# EAGLE board UDOOCONNECTIVITYSHIELD (EAGLE 7.1.0)
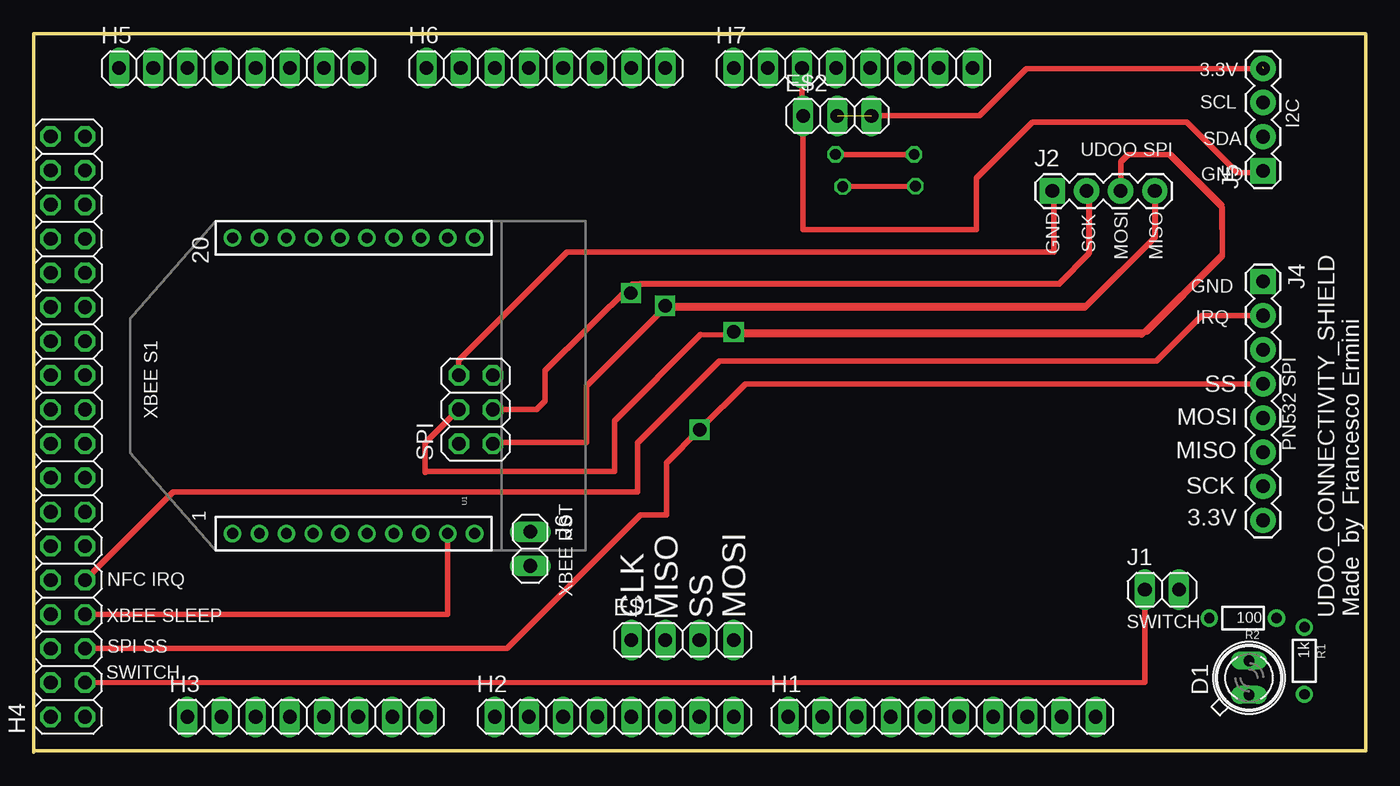
[diagram p0: board, top side]
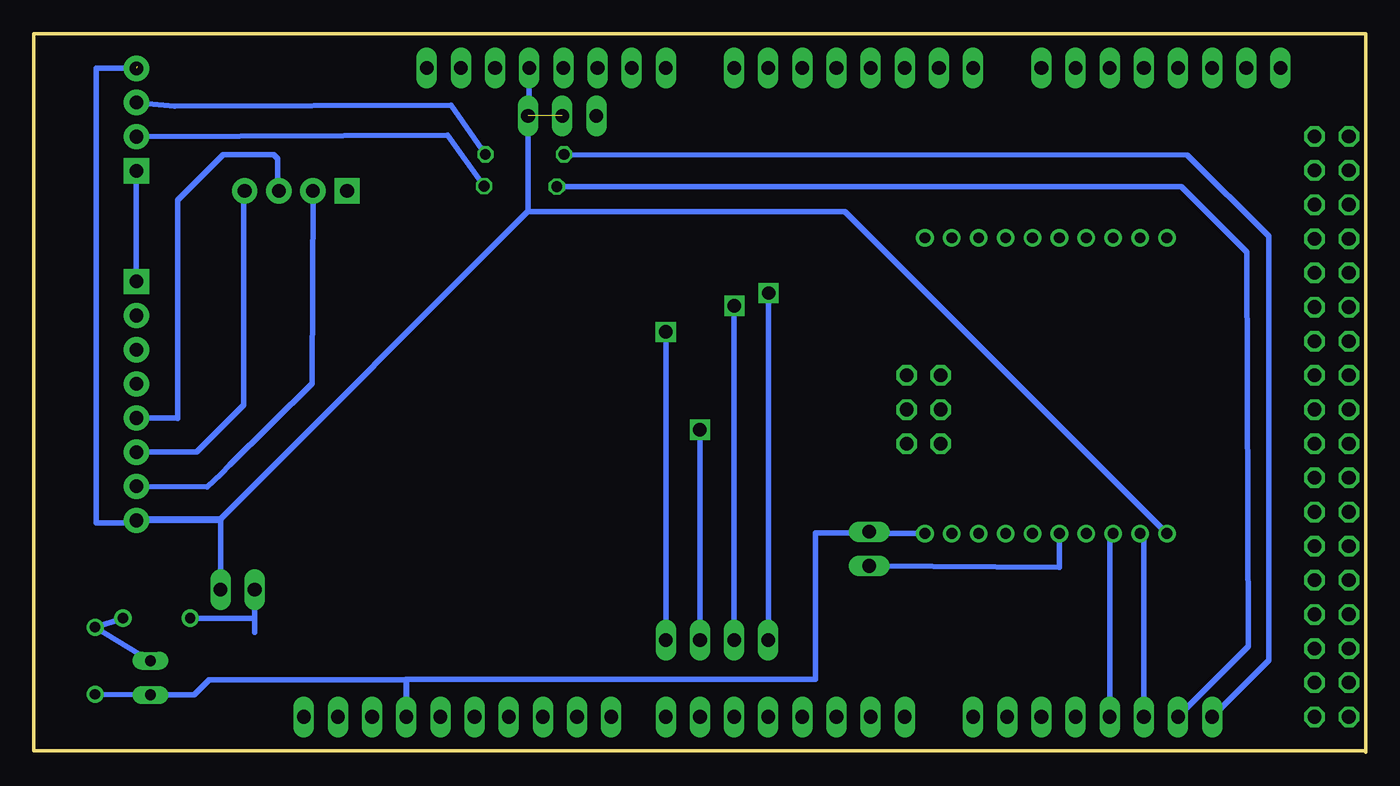
[diagram p1: board, bottom side, seen from below]

Size 99.09 x 53.47 mm. Coordinates in mm from the lower left corner, seen from the top.
Outline: 0,0.1 99.09,0.1 99.09,53.47 0,53.47 0,0.1
Outline: 0,0.1 0,0
Copper layers (1*16): Top 0.035mm / dielectric 1.5mm / Bottom 0.035mm
Design rules "default": minimum track width 10mil, minimum drill 24mil, track to track 8mil, track to pad 8mil, pad to pad 8mil, via to via 8mil, smd to smd 8mil, copper to edge 40mil, drill to drill 8mil, minimum pad ring 10mil, minimum via ring 8mil, stop-mask expansion 4mil, vias tented up to drill 0mil, thermal gap 10mil
Net classes: 0 default: width 0.254 mm

## Footprints (pad centres in the part's own frame; a part is rotated, then mirrored left to right if it is on the bottom)
SFH480 = drill 0.813 long: A 1.27,0; K -1.27,0
1X04 = drill 1.016 long: 1 -3.81,0; 2 -1.27,0; 3 1.27,0; 4 3.81,0
1X03 = drill 1.016 long: 1 -2.54,0; 2 0,0; 3 2.54,0
1X10 = drill 1.016 long: 1 -11.43,0; 2 -8.89,0; 3 -6.35,0; 4 -3.81,0; 5 -1.27,0; 6 1.27,0; 7 3.81,0; 8 6.35,0; 9 8.89,0; 10 11.43,0
1X08 = drill 1.016 long: 1 -8.89,0; 2 -6.35,0; 3 -3.81,0; 4 -1.27,0; 5 1.27,0; 6 3.81,0; 7 6.35,0; 8 8.89,0
2X18 = drill 1.016 octagon: 1 -21.59,-1.27; 2 -21.59,1.27; 3 -19.05,-1.27; 4 -19.05,1.27; 5 -16.51,-1.27; 6 -16.51,1.27; 7 -13.97,-1.27; 8 -13.97,1.27; 9 -11.43,-1.27; 10 -11.43,1.27; 11 -8.89,-1.27; 12 -8.89,1.27; 13 -6.35,-1.27; 14 -6.35,1.27; 15 -3.81,-1.27; 16 -3.81,1.27; 17 -1.27,-1.27; 18 -1.27,1.27; 19 1.27,-1.27; 20 1.27,1.27; 21 3.81,-1.27; 22 3.81,1.27; 23 6.35,-1.27; 24 6.35,1.27; 25 8.89,-1.27; 26 8.89,1.27; 27 11.43,-1.27; 28 11.43,1.27; 29 13.97,-1.27; 30 13.97,1.27; 31 16.51,-1.27; 32 16.51,1.27; 33 19.05,-1.27; 34 19.05,1.27; 35 21.59,-1.27; 36 21.59,1.27
1X02 = drill 1.016 long: 1 -1.27,0; 2 1.27,0
1X04' = drill 1.016 pad 1.88 square: 1 0,0 | drill 1.016 pad 1.88: 2 2.54,0; 3 5.08,0; 4 7.62,0
1X08' = drill 1.016 pad 1.88 square: 1 0,0 | drill 1.016 pad 1.88: 2 2.54,0; 3 5.08,0; 4 7.62,0; 5 10.16,0; 6 12.7,0; 7 15.24,0; 8 17.78,0
1/6W-RES = drill 0.762: 1 -2.5,0; 2 2.5,0
2X03 = drill 1.016 octagon: 1 -2.54,-1.27; 2 -2.54,1.27; 3 0,-1.27; 4 0,1.27; 5 2.54,-1.27; 6 2.54,1.27
XBEE-1 = drill 0.8: 1 -11,20; 2 -11,18; 3 -11,16; 4 -11,14; 5 -11,12; 6 -11,10; 7 -11,8; 8 -11,6; 9 -11,4; 10 -11,2; 11 11,2; 12 11,4; 13 11,6; 14 11,8; 15 11,10; 16 11,12; 17 11,14; 18 11,16; 19 11,18; 20 11,20

## Placement (x,y rotation side)
D1  [SFH480]  90.4,5.54 90 top
E$1  [1X04]  48.26,8.36 0 top
E$2  [1X03]  59.77,47.35 0 top
H1  [1X10]  67.56,2.64 0 top  (not fitted)
H2  [1X08]  43.18,2.64 0 top  (not fitted)
H3  [1X08]  20.32,2.64 0 top  (not fitted)
H4  [2X18]  2.54,24.23 90 top  (not fitted)
H5  [1X08]  15.24,50.9 0 top  (not fitted)
H6  [1X08]  38.1,50.9 0 top  (not fitted)
H7  [1X08]  60.96,50.9 0 top  (not fitted)
J1  [1X02]  83.92,12.09 0 top
J2  [1X04']  75.77,41.76 0 top
J4  [1X08']  91.44,35.03 270 top
J5  [1X04']  91.44,43.26 90 top
J6  [1X02]  36.93,15.14 270 top
R1  1k  [1/6W-RES]  94.51,6.81 270 top
R2  100  [1/6W-RES]  89.94,9.98 180 top
SPI  [2X03]  32.89,25.5 90 top  (not fitted)
U1  XBEE  [XBEE-1]  34.8,27.28 90 top

## Library data of the parts
D1 = led
E$1 E$2 H1-H7 J1 J6 SPI = pinhead
J2 J4 J5 = SparkFun-Connectors
R1 R2 = SparkFun-Passives
U1 = SparkFun

## Nets
S$1: E$2.2 E$2.3 H7.5 J1.2 J4.8 J5.4 U1.1
S$3: H3.1 J5.3
S$5: H3.4 U1.3
S$6: H3.3 U1.2
S$7: H4.3 J1.1 R2.2
S$8: E$1.2 J2.4 J4.6 SPI.1
S$9: E$1.1 J2.2 J4.7 SPI.3
S$10: J6.2 U1.5
S$11: J2.1 SPI.6
S$12: E$1.4 J2.3 J4.5 SPI.4
S$13: E$1.3 H4.5 J4.4
S$14: H4.7 U1.9
S$15: E$2.1 H7.3 J4.1 J5.1
S$16: D1.A R1.1 R2.1
S$18: H4.9 J4.2
S$19: J4.3
S$21: H3.2 J5.2
S$24: D1.K H1.7 J6.1 R1.2 U1.10

## Tracks (layer width: path | path; a pad name or v marks a point on that pad's centre or on a via)
S$1  (2 unrouted)
  Top 0.406: E$2.3 70.33,47.35 73.84,50.85 91.21,50.85 91.36,51
  Bottom 0.406: J5.4 94.41,50.88 94.41,17.07 91.44,17.07 J4.8 | H7.5 62.23,47.42 E$2.3 62.31,40.26 62.33,40.23 | 62.33,40.23 85.19,17.37 91.31,17.37 J4.8 | J1.2 85.19,17.25 J4.8 | U1.1 38.75,40.23 62.33,40.23
S$3  (via drill 0.8)
  Top 0.406: v59.64,44.47 v65.48,44.47
  Bottom 0.406: H3.1 7.24,6.83 7.24,38.4 13.28,44.42 v59.64,44.47 | v65.48,44.47 68.02,48.13 88.6,48.08 J5.3
S$5
  Bottom 0.406: U1.3 19.05,16.28 H3.4
S$6
  Bottom 0.406: U1.2 16.51,16.28 H3.3
S$7
  Top 0.406: H4.3 82.65,5.21 J1.1
  Bottom 0.406: J1.1 82.65,8.99 | J1.1 82.65,8.94 | J1.1 82.65,9.25 | J1.1 82.65,9.98 R2.2
S$8  (via drill 1)
  Top 0.406: SPI.1 34.26,23.06 41.12,23.06 41.12,27.25 46.91,33.04 78.13,33.04 83.39,38.3 J2.4 83.41,41.73 83.41,38.33 78.31,33.22 v46.96,33.22
  Bottom 0.406: v46.96,33.22 46.99,33.2 E$1.2 | 91.44,22.3 J4.6 86.97,22.33 83.46,25.83 83.46,41.68 J2.4
S$9  (via drill 1)
  Top 0.406: SPI.3 37.41,25.5 38.05,26.14 38.05,28.4 44.55,34.85 76.28,34.85 78.51,37.13 78.51,41.55 J2.2 78.49,41.76 78.49,37.08 76.28,34.87 45.14,34.87 v44.42,34.16
  Bottom 0.406: J2.2 78.38,27.43 84.51,21.39 85.14,20.73 86.18,19.74 91.41,19.76 J4.7 | v44.42,34.16 44.42,8.38 E$1.1
S$10
  Bottom 0.406: U1.5 22.8,13.77 J6.2
S$11
  Top 0.406: SPI.6 31.62,29.13 39.67,37.21 75.9,37.21 75.9,41.35 J2.1
S$12  (via drill 1)
  Top 0.406: SPI.4 29.13,23.01 29.13,20.83 29.18,20.88 43.21,20.88 43.21,24.66 49.61,31.06 82.4,31.04 88.39,37.03 88.37,40.69 84.58,44.47 84.46,44.47 | 81.46,44.47 81.38,44.47 80.85,43.94 80.85,43.89 | J2.3 80.85,43.89 | 80.85,43.89 81.36,44.4 81.38,44.4 81.46,44.47 | 81.46,44.47 84.46,44.47 | 84.46,44.47 88.29,40.64 88.32,40.64 88.42,40.54 88.42,36.91 82.78,31.27 v52.07,31.27
  Bottom 0.406: 91.41,24.84 J4.5 88.39,24.87 88.37,24.84 88.37,41.1 84.99,44.47 81.23,44.47 80.92,44.17 80.92,41.83 J2.3 | v52.07,31.27 E$1.4
S$13  (via drill 1)
  Top 0.406: J4.4 52.93,27.41 v49.53,24 47.07,21.54 47.07,17.65 45.14,17.65 35.2,7.72 H4.5
  Bottom 0.406: 91.41,27.43 J4.4 | v49.53,24 E$1.3
S$14
  Top 0.406: H4.7 30.8,10.26 U1.9
S$15
  Top 0.406: H7.3 57.15,47.42 E$2.1 57.23,38.89 70.1,38.89 70.1,42.72 74.27,46.89 85.78,46.89 89.54,43.13 91.31,43.13 J5.1
  Bottom 0.406: J4.1 J5.1
S$16
  Bottom 0.406: D1.A R1.1 R2.1
S$18
  Top 0.406: J4.2 86.89,32.49 83.52,29.11 51,29.11 44.91,23.01 44.91,19.38 10.39,19.38 H4.9
S$19
  Top 0.406: 91.41,29.97 J4.3
S$21  (via drill 0.8)
  Top 0.406: v60.17,42.09 v65.58,42.11
  Bottom 0.406: H3.2 8.74,7.87 8.84,37.21 13.72,42.09 v60.17,42.09 | v65.58,42.11 68.3,45.92 J5.2
S$24
  Bottom 0.406: U1.10 37.16,16.28 J6.1 36.93,16.31 40.94,16.31 40.94,5.44 71.35,5.44 71.35,2.64 H1.7 71.37,5.38 71.4,5.38 | 71.4,5.38 71.4,5.44 | 71.4,5.38 86.03,5.38 87.15,4.27 D1.K R1.2

## Text on the board
tPlace: 3.3V | SCL | I2C | SDA | UDOO SPI | GND | GND | SCK | MOSI | MISO | 20 | Made by Francesco Ermini | SS | XBEE S1 | MOSI | MISO | PN532 SPI | SCK | 1 | 3.3V | NFC IRQ | XBEE RST | XBEE SLEEP | CLK | MISO | SS | MOSI | UDOO_CONNECTIVITY_SHIELD | SWITCH | SPI SS | SWITCH
tNames: GND | IRQ
bDocu: GND | MOSI | SCK | MISO | DIN | 3.3V | DOUT | RST | GND | SLEEP